# Altium PCB IR2104S_V3.PcbDoc
Units mil, origin at the board's own origin, x right, y up, seen from the top; angles counter-clockwise.
Board outline 6000 x 4000 mil, 2 copper layers (Top Layer, Bottom Layer); 26 components, 22 nets, 84 pads, 0 vias.
Unrouted connection lines stored in the file: 56.
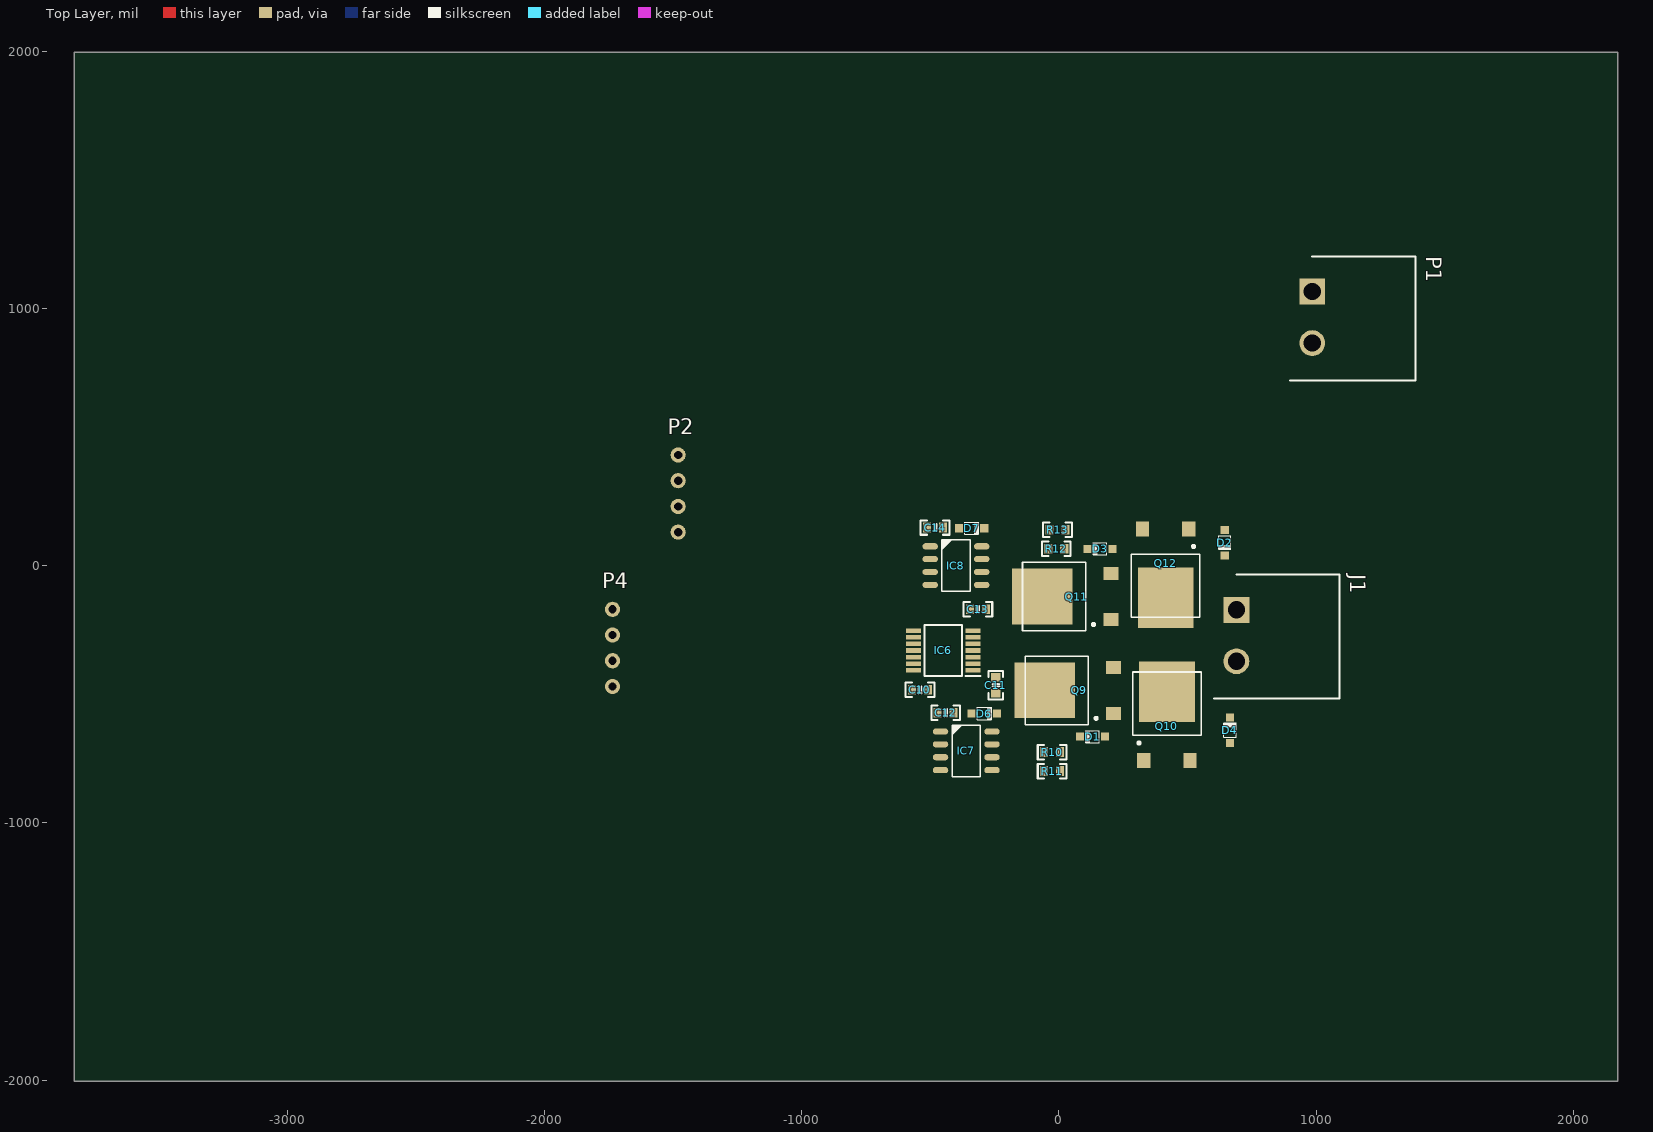
[diagram p0: Top Layer view]
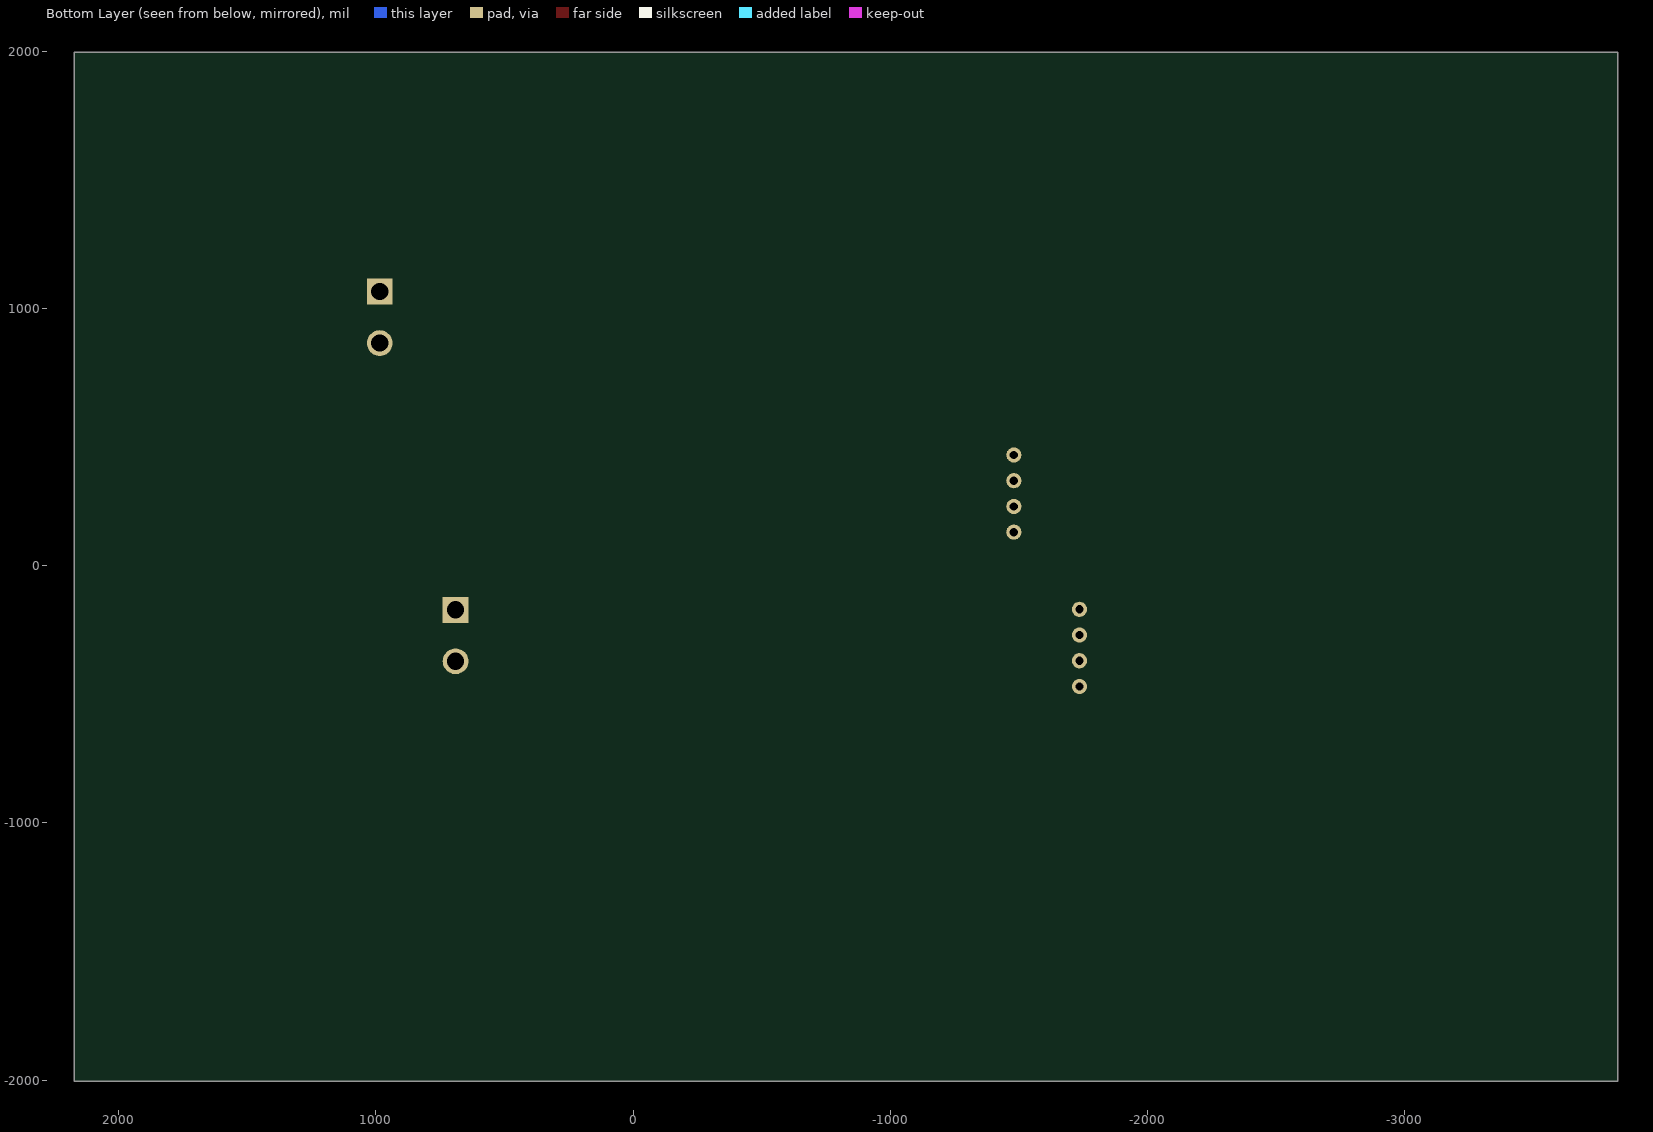
[diagram p1: Bottom Layer view, seen from below]

## Layer stack, top to bottom
Top Solder: solder mask 0.4, Solder Resist, Dk 3.5
Top Layer: signal copper 1.4
Dielectric 1: dielectric 12.6, FR-4, Dk 4.8
Bottom Layer: signal copper 1.4
Bottom Solder: solder mask 0.4, Solder Resist, Dk 3.5

## Board outline
-3827.53,-2004.56 2172.47,-2004.56 2172.47,1995.44 -3827.53,1995.44

## Design rules (kind name [scope] priority, off if disabled: settings)
Clearance [All] p1: gap=10 ignorepadtopadclearanceinfootprint=FALSE except(0: Arc-Hole Track-Hole SMDPad-Hole THPad-Hole Via-Hole Fill-Hole Poly-Hole Region-Hole Text-Hole)
PolygonConnect [All] p1: connectstyle=Relief reliefconductorwidth=10 reliefentries=4 polygonreliefangle="90 Angle" airgapwidth=10
RoutingVias [All] p1: holewidth=28 width=50 viastyle="Through Hole" minholewidth=28 minwidth=50 maxholewidth=28 maxwidth=50
SolderMaskExpansion [All] p1: expansion=4 istentingtop=FALSE
Width [All] p1: maxlimit=10 minlimit=10 preferedwidth=10
30 further rules are at their usual default settings.

## Components (designator, comment, footprint, x,y, rotation, side; value= is the part's Value field where it differs from the comment)
C10 "100nF" CAP-0603 -540,-483.17 r180 top
C11 "1uF/25V" CAP-0603 -245,-465 r90 top
C12 "100nF" CAP-0603 -440,-572.06 r0 top
C13 "1uF/25V" CAP-0603 -315,-170 r0 top
C14 "100nF" CAP-0603 -481.1,147.94 r0 top
D1 "SS14" SOD_323 130.79,-665 r0 top
D2 "SS14" SOD_323 645,89.21 r90 top
D3 "SS14" SOD_323 160,65 r0 top
D4 "SS14" SOD_323 665,-640 r270 top
D6 "SS14" SOD_323 -290,-575 r180 top
D7 "SS14" SOD_323 -339.29,145 r180 top
IC6 "SN74HC08PW" TSSOP14 -450,-330 r180 top
IC7 "IR2104S" SOIC_8 -360,-720 r270 top
IC8 "IR2104S" SOIC_8 -400,0 r270 top
J1 "WJ2EDGRC-5.08-2P" WJ2EDGRC-5.08-2P 690,-172.02 r270 top
P1 "WJ2EDGRC-5.08-2P" WJ2EDGRC-5.08-2P 985,1065 r270 top
P2 "HDR1x4_2.54" HDR1x4_2.54_180 -1480,430 r0 top
P4 "HDR1x4_2.54" HDR1x4_2.54_180 -1735,-170 r0 top
Q9 "AP30H80K" TO-252 212.72,-575.16 r180 top
Q10 "AP30H80K" TO-252 329.84,-757.72 r90 top
Q11 "AP30H80K" TO-252 202.72,-210.16 r180 top
Q12 "AP30H80K" TO-252 505.16,142.72 r270 top
R10 "51R" R-0603 -26.1,-725 r0 top
R11 "51R" R-0603 -26.1,-798.88 r0 top
R12 "51R" R-0603 -10,65 r0 top
R13 "51R" R-0603 -5,138.88 r0 top

## Footprints (in the part's own frame and the unit in brackets; to place one, negate y for a bottom-side part, rotate by r counter-clockwise, add the part's x,y. Pads: shape width x height; smd on the part's side, far side on the other; paste and mask are expansions set on the pad)
CAP-0603 [mm]
  rect 0.8x0.96 smd: 1(-0.79,0) 2(0.79,0)
  silkscreen extent -1.42,-0.71 1.42,0.71, body extent -0.76,-0.39 0.76,0.39, height 0.9
HDR1x4_2.54_180 [mm]
  round 1.5 hole 0.813: 1(0,0) 2(0,-2.54) 3(0,-5.08) 4(0,-7.62)
  body extent -1.25,-8.89 1.25,1.27, height 8.2
R-0603 [mm]
  rect 0.8x0.96 smd: 1(-0.79,0) 2(0.79,0)
  silkscreen extent -1.42,-0.71 1.42,0.71, body extent -0.76,-0.38 0.76,0.38, height 0.41
SOD_323 [mm]
  rect 0.8x0.8 smd: 1(1.25,0) 2(-1.25,0)
  silkscreen extent -0.72,-0.6 0.67,0.6, body extent -1.3,-0.68 1.3,0.68, height 1.1
SOIC_8 [mil]
  oval 24x60 smd: 1(-75,-100.02) 2(-25,-100.02) 3(25,-100.02) 4(75,-100.02) 5(75,99.98) 6(25,99.98) 7(-25,99.98) 8(-75,99.98)
  silkscreen extent -100,-55 100,55, body extent -96,-118 96,118, height 69
TO-252 [mm] "贴片MOS管"
  rect 1.5x1.3 smd: 1(0,0) 2(0,-4.56)
  rect 6x5.5 smd: 3(6.8,-2.29)
  silkscreen extent 1.61,-5.66 8.74,1.09, body extent -0.56,-5.65 9.54,1.08, height 2.37
TSSOP14 [mm]
  rect 1.475x0.45 smd: 1(-2.938,1.95) 2(-2.938,1.3) 3(-2.938,0.65) 4(-2.938,0) 5(-2.938,-0.65) 6(-2.938,-1.3) 7(-2.938,-1.95) 8(2.938,-1.95) 9(2.938,-1.3) 10(2.938,-0.65) 11(2.938,0) 12(2.938,0.65) 13(2.938,1.3) 14(2.938,1.95)
  silkscreen extent -3.67,-2.5 1.85,2.52, body extent -3.2,-2.5 3.2,2.5, height 1.2
WJ2EDGRC-5.08-2P [mm]
  rect 2.55x2.55 hole 1.7: 1(0,0)
  round 2.55 hole 1.7: 2(5.08,0)
  silkscreen extent -3.49,-2.2 8.77,10.2, body extent -3.49,-2.2 8.57,10, height 8.3

## Part data
C10 C11 C12 C13 C14: library part CAP, "贴片电容", Package=0402, SuppliersPartNumber=C52923, ComponentLink1Description=供应商链接, ComponentLink1URL=http://www.szlcsc.com/product/details_53938.html, Supplier=LC
D1 D2 D3 D4 D6 D7: library part DIODE, "二极管", Package=SMA(DO-214AC), SuppliersPartNumber=C22452, ComponentLink1Description=供应商链接, ComponentLink1URL=http://www.szlcsc.com/product/details_23178.html, Supplier=LC
IC6: "Integrated Circuit", Arrow Part Number=SN74HCT08PW, Manufacturer_Name="Texas Instruments", Mouser Part Number=595-SN74HCT08PW, Arrow Price/Stock=https://www.arrow.com/en/products/sn74hct08pw/texas-instruments, Datasheet Link=http://www.ti.com/lit/gpn/SN74HCT08, Height=1.2mm, Manufacturer_Part_Number=SN74HCT08PW, Mouser Price/Stock=https://www.mouser.co.uk/ProductDetail/Texas-Instruments/SN74HCT08PW?qs=7KMwW2o1%252BmRuz7pKtn1cmg%3D%3D
IC7 IC8: "Integrated Circuit", Manufacturer_Name=Infineon, Datasheet Link=http://www.infineon.com/dgdl/ir2104.pdf?fileId=5546d462533600a4015355c7c1c31671, Height=1.75mm, Manufacturer_Part_Number=IR2104S
J1 P1: "Connector", Manufacturer_Name="Ningbo Kangnex", Datasheet Link=https://datasheet.lcsc.com/szlcsc/Ningbo-Kangnex-Elec-WJ2EDGRC-5-08-2P_C3697.pdf, Height=8.3mm, Manufacturer_Part_Number=WJ2EDGRC-5.08-2P
P2 P4: "Header"
Q9 Q10 Q11 Q12: library part N-MOS, "N 沟道 MOS", Manufacturer_Name=Nexperia, Manufacturer_Part_Number=SI2302DS, Mouser Part Number=N/A, RS Part Number=7983053P, Datasheet Link=https://assets.nexperia.com/documents/data-sheet/SI2302DS.pdf, Height=1.1mm, Mouser Price/Stock=https://www.mouser.com/Search/Refine.aspx?Keyword=N%2FA, RS Price/Stock=http://uk.rs-online.com/web/p/products/7983053P
R10 R11 R12 R13: library part RES, "贴片电阻", Package=0805, SuppliersPartNumber=C17798, Supplier=LC

## Nets (pads, with @x,y where several pads share a name; then routed paths per layer and width w, separated by ;. In a path a pad name is that pad's centre, name@x,y a point inside that pad or via, vN(x,y) a via of type N, cw(c..) or ccw(c..) an arc to the next point about the centre after c; other vN are vias at no path point)
5V: C10.2 IC6.14 P2.2
12V: C12.2 C14.2 D6.1 D7.1 IC7.1 IC8.1 P2.1
DIR1A: IC6.2 P4.2
DIR1B: IC6.5 P4.3
GND: C10.1 C12.1 C14.1 D2.1 D4.1 IC6.7 IC7.4 IC8.4 P1.1 P2.3 P2.4 Q10.2 Q12.2
M1A: C11.2 D1.1 D2.2 IC7.6 J1.2 Q9.2 Q10.3
M1B: C13.2 D3.1 D4.2 IC8.6 J1.1 Q11.2 Q12.3
NetC11_1: C11.1 D6.2 IC7.8
NetC13_1: C13.1 D7.2 IC8.8
NetIC7_5: IC7.5 R11.1
NetIC7_7: IC7.7 R10.1
NetIC8_5: IC8.5 R13.1
NetIC8_7: IC8.7 R12.1
NetQ9_1: Q9.1 R10.2
NetQ10_1: Q10.1 R11.2
NetQ11_1: Q11.1 R12.2
NetQ12_1: Q12.1 R13.2
PWM1: IC6.1 IC6.4 P4.1
PWM1A: IC6.3 IC7.2
PWM1B: IC6.6 IC8.2
SD: IC7.3 IC8.3 P4.4
VM: D1.2 D3.2 P1.2 Q9.3 Q11.3
pads on no net: IC6.8 IC6.9 IC6.10 IC6.11 IC6.12 IC6.13